# Altium PCB PCB2.PcbDoc
Units mil, origin at the board's own origin, x right, y up, seen from the top; angles counter-clockwise.
Board outline 2195 x 3890 mil, 2 copper layers (Top Layer, Bottom Layer); 16 components, 21 nets, 92 pads, 6 vias.
Unrouted connection lines stored in the file: 4.
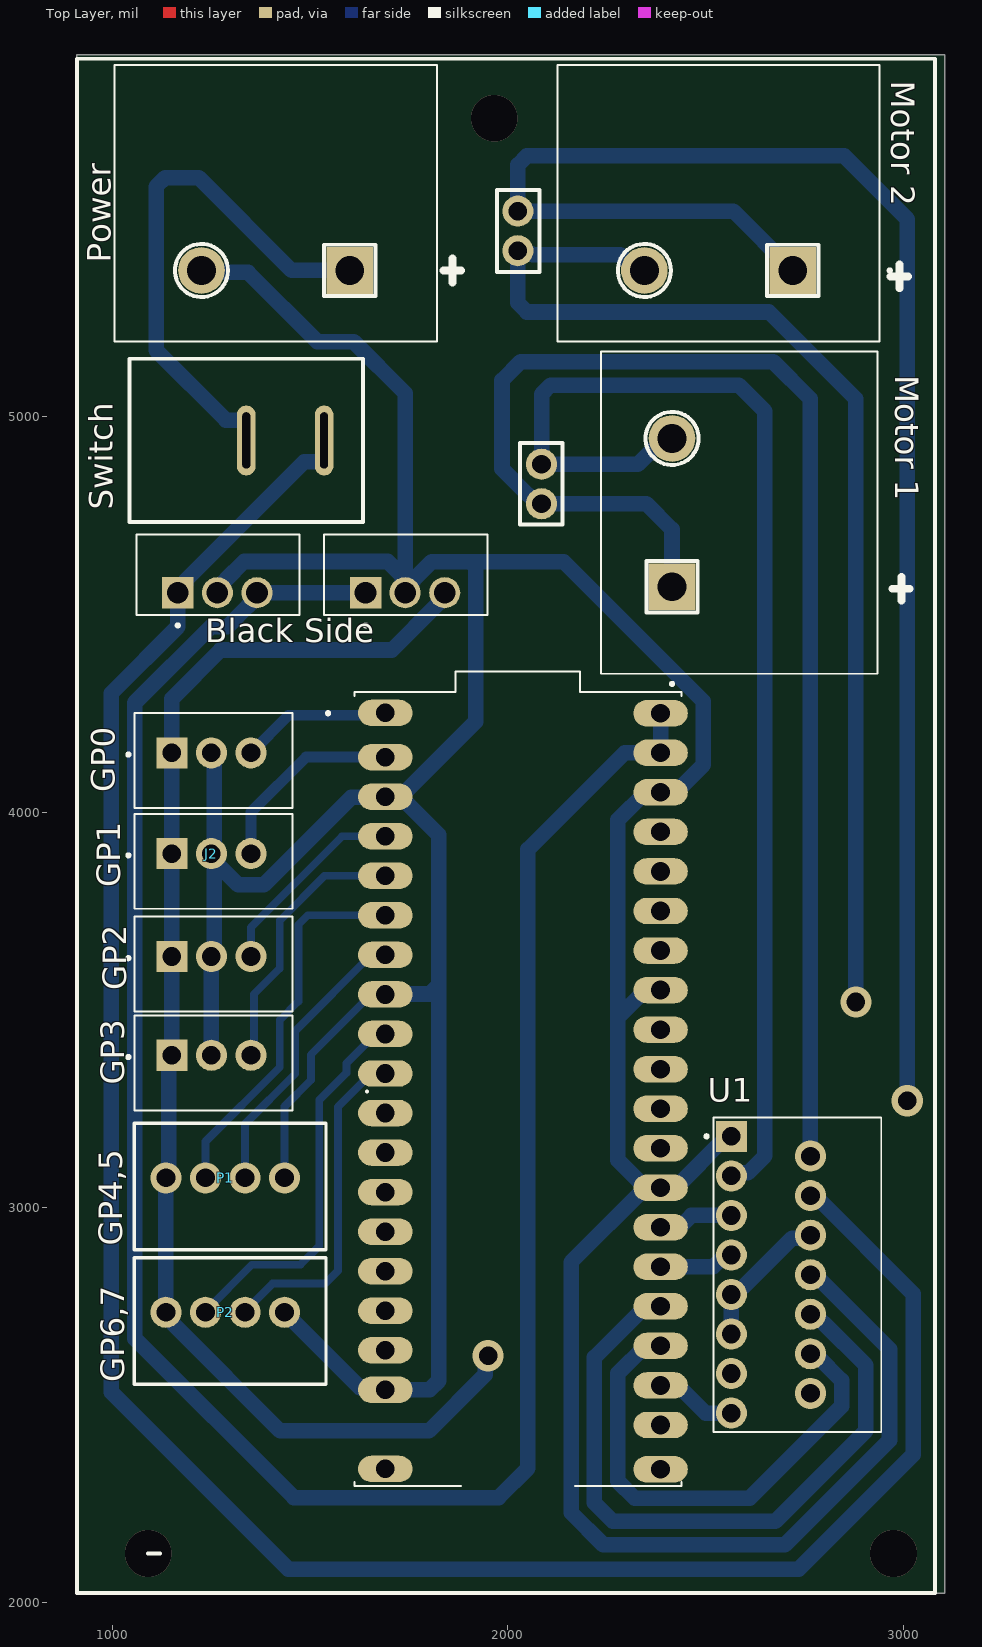
[diagram p0: Top Layer view]
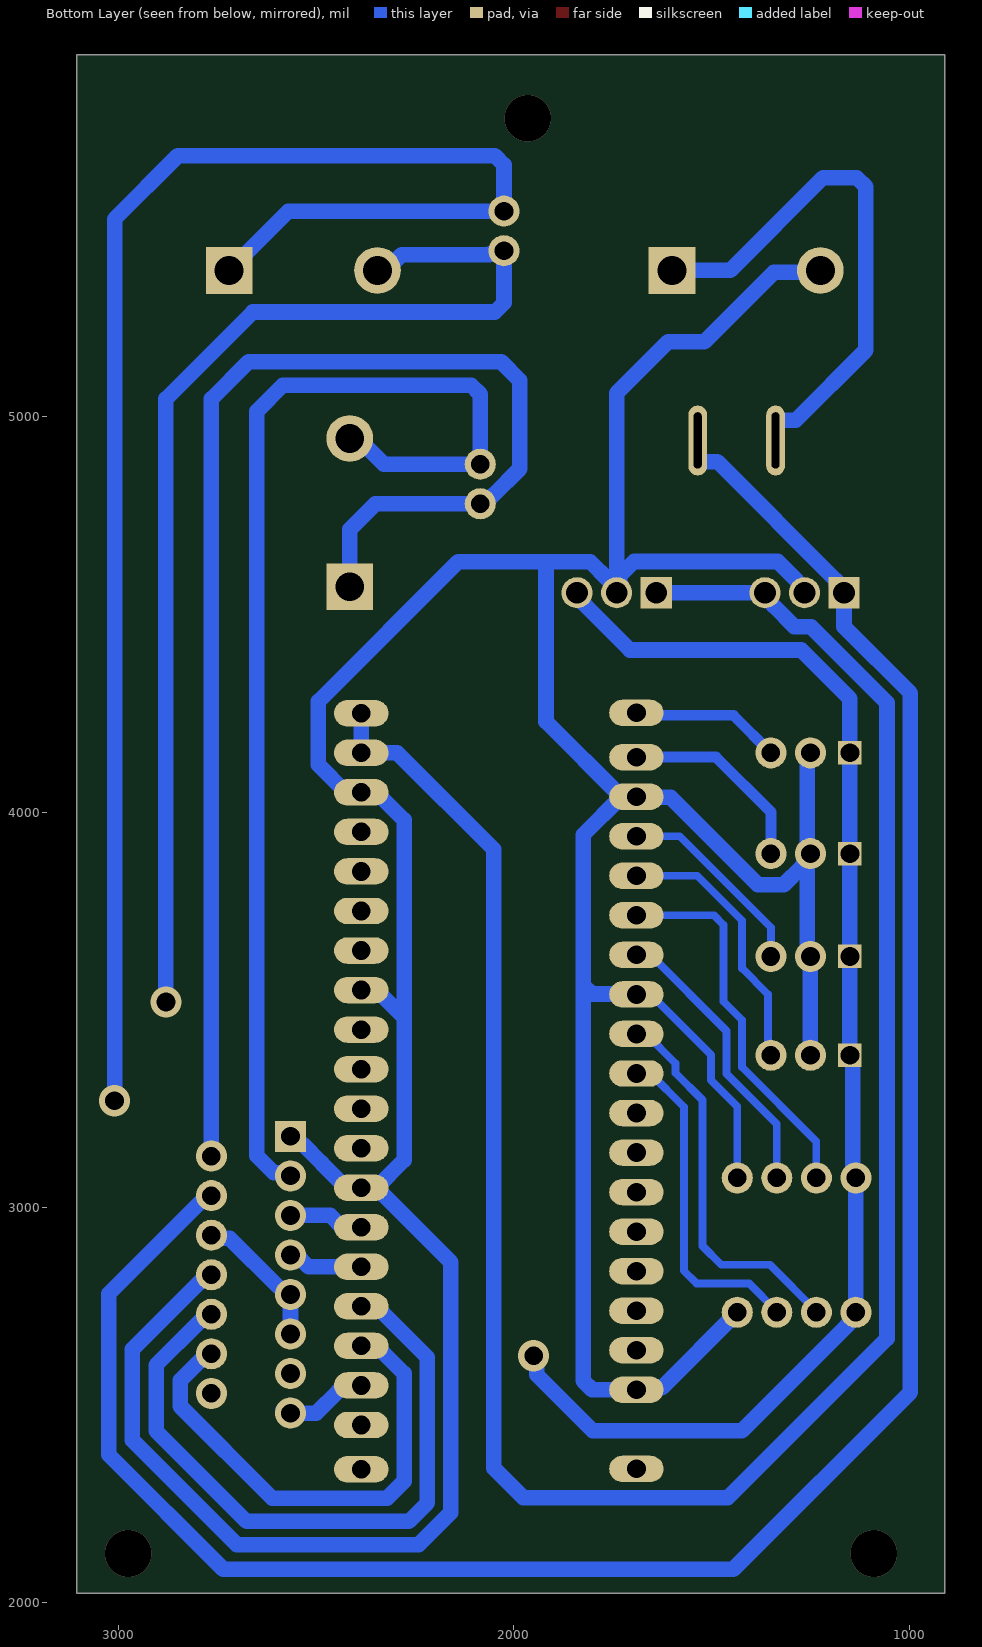
[diagram p1: Bottom Layer view, seen from below]
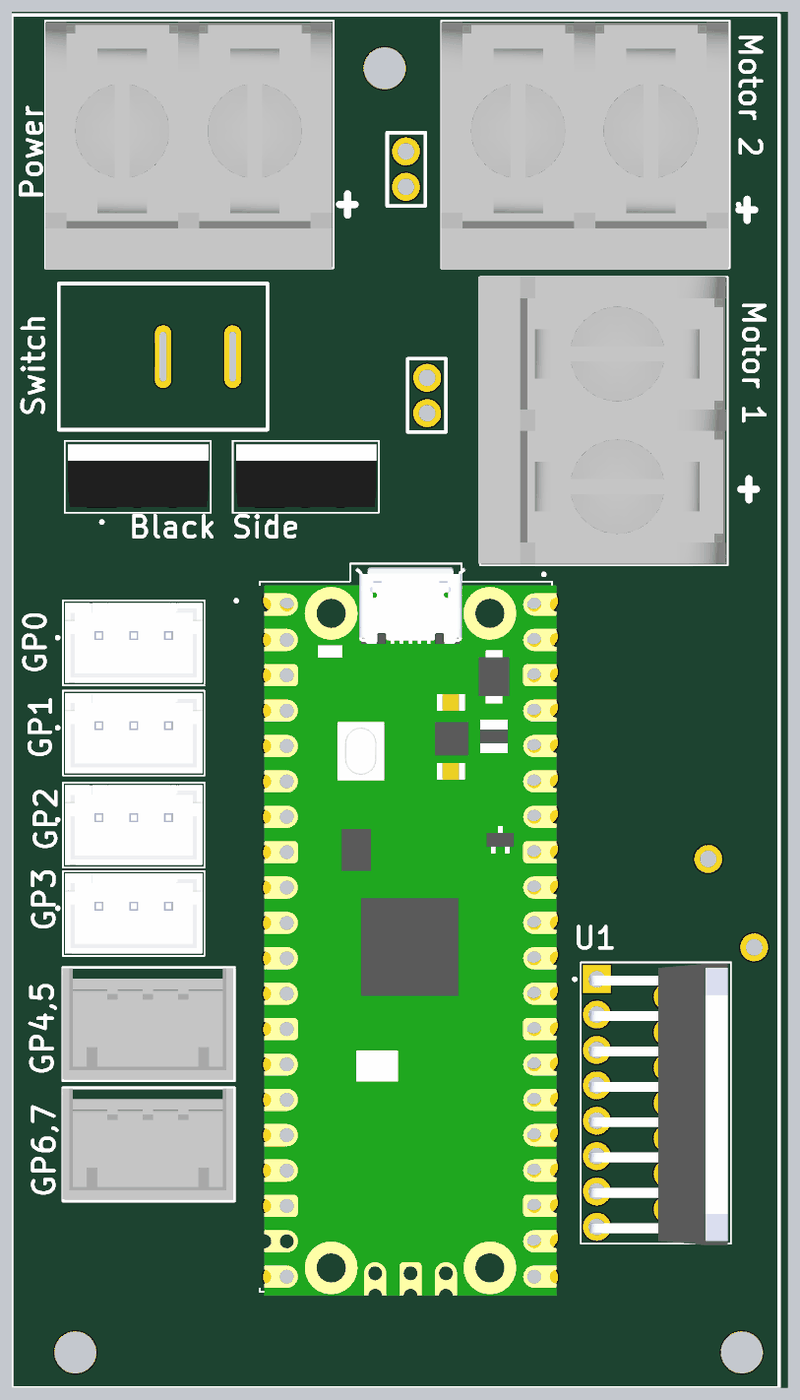
[diagram p2: 3D render of the assembled board from above, using the file's embedded part models]

## Layer stack, top to bottom
Top Solder: solder mask 0.4, Solder Resist, Dk 3.5
Top Layer: signal copper 1.4
Dielectric 1: dielectric 12.6, FR-4, Dk 4.8
Bottom Layer: signal copper 1.4
Bottom Solder: solder mask 0.4, Solder Resist, Dk 3.5

## Board outline
910,2025 3105,2025 3105,5915 910,5915

## Design rules (kind name [scope] priority, off if disabled: settings)
Clearance [All] p1: gap=19.68 ignorepadtopadclearanceinfootprint=TRUE
PolygonConnect [All] p1: connectstyle=Relief reliefconductorwidth=10 reliefentries=4 polygonreliefangle="90 Angle" airgapwidth=10
RoutingVias [All] p1: holewidth=28 width=50 viastyle="Through Hole" minholewidth=28 minwidth=50 maxholewidth=28 maxwidth=50
SolderMaskExpansion [All] p1: expansion=4 istentingtop=FALSE
Width [All] p1: maxlimit=39.37 minlimit=19.68 preferedwidth=27.56
30 further rules are at their usual default settings.

## Classes and differential pairs
component class Sheet2: J2 "Motor 2" P1 P2 Power U1

## Components (designator, comment, footprint, x,y, rotation, side; value= is the part's Value field where it differs from the comment)
* "switch" SWITCH 1193.87,4980.69 r270 top
*1 "Rasperi Pi" "RASPERI PI" 2025,3300 r0 top
*2 "regulator 3.3v" "REGULATOR 3.3V" 1640,4555 r0 top
*3 "regulator 7805" "REGULATOR 7805" 1165,4555 r0 top
*4 "Capacitor M1" CAPACITOR 2085,4880 r270 top
*5 "Capacitor M2" CAPACITOR 2025,5420 r90 top
GP0 "IR FL" "3PIN JST" 1250,4170.67 r0 top (schematic designator J1)
GP1 "IR BL" "3PIN JST" 1250,3655.67 r0 top (schematic designator J5)
GP2 "IR BR" "3PIN JST" 1250,3405.67 r0 top (schematic designator J3)
J2 "IR FR" "3PIN JST" 1250,3915.67 r0 top
J4 "Motor 1" "POWER TERMINAL BLOCK" 2415,4570 r90 top
"Motor 2" "Motor 2" "POWER TERMINAL BLOCK" 2720.2,5370 r180 top (schematic designator J6)
P1 "ULTR FL" "4PIN JST" 1260,3273 r0 top
P2 "ULTR FR" "4PIN JST" 1260,2933 r0 top
Power "Power" "POWER TERMINAL BLOCK" 1600,5370 r180 top (schematic designator J7)
U1 "L298N" L298N 2565,3180 r0 top

## Footprints (in the part's own frame and the unit in brackets; to place one, negate y for a bottom-side part, rotate by r counter-clockwise, add the part's x,y. Pads: shape width x height; smd on the part's side, far side on the other; paste and mask are expansions set on the pad)
"3PIN JST" [mm]
  rect 2x2 / inner round 1.508 / far side rect 1.508x1.508 hole 1.2: 1(-2.54,-0.525)
  round 2 hole 1.2: 2(0,-0.525) 3(2.54,-0.525)
  silkscreen extent -5.43,-4.06 5.21,2.03, body extent -4.82,-3.89 5.08,1.86, height 7
"4PIN JST" [mm]
  round 2 hole 1.2: 1(-3.175,-5.029) 2(-0.635,-5.029) 3(1.905,-5.029) 4(4.445,-5.029)
  silkscreen extent -5.21,-9.65 7.11,-1.52, body extent -5.26,-9.53 7.04,-1.57, height 10.43
CAPACITOR [mm]
  round 2 hole 1.2: 1(0,0) 2(2.54,0)
  silkscreen extent -1.37,-1.4 3.89,1.35
L298N [mm]
  rect 2x2 hole 1.2: 1(0,0)
  round 2 hole 1.2: 2(5.08,-1.27) 3(0,-2.54) 4(5.08,-3.81) 5(0,-5.08) 6(5.08,-6.35) 7(0,-7.62) 8(5.08,-8.89) 9(0,-10.16) 10(5.08,-11.43) 11(0,-12.7) 12(5.08,-13.97) 13(0,-15.24) 14(5.08,-16.51) 15(0,-17.78)
  silkscreen extent -1.69,-18.99 9.63,1.21, body extent -0.49,-19.09 9.4,1.11, height 21.15
"POWER TERMINAL BLOCK" [mm]
  rect 3x3 hole 1.854: 1(0,0)
  round 3 hole 1.854: 2(9.53,0)
  silkscreen extent -6.34,-13.21 15.12,4.57, body extent -5.47,-13.08 15.13,4.7, height 15.86
"RASPERI PI" [mm]
  oval 3.5x1.7 hole 1.2: 1(-8.509,24.155) 2(-8.509,21.311) 3(-8.509,18.771) 4(-8.509,16.231) 5(-8.509,13.691) 6(-8.509,11.151) 7(-8.509,8.611) 8(-8.509,6.071) 9(-8.509,3.531) 10(-8.509,0.991) 11(-8.509,-1.549) 12(-8.509,-4.089) 13(-8.509,-6.629) 14(-8.509,-9.169) 15(-8.509,-11.709) 16(-8.509,-14.249) 17(-8.509,-16.789) 18(-8.509,-19.329) 20(-8.509,-24.409) 21(9.169,-24.435) 22(9.169,-21.59) 23(9.169,-19.05) 24(9.169,-16.51) 25(9.169,-13.97) 26(9.169,-11.43) 27(9.169,-8.89) 28(9.169,-6.35) 29(9.169,-3.81) 30(9.169,-1.27) 31(9.169,1.27) 32(9.169,3.81) 33(9.169,6.35) 34(9.169,8.89) 35(9.169,11.43) 36(9.169,13.97) 37(9.169,16.51) 38(9.169,19.05) 39(9.169,21.59) 40(9.169,24.13)
  silkscreen extent -12.29,-25.5 10.5,26.8, body extent -10.17,-25.78 10.83,26.52, height 3.38
"REGULATOR 3.3V" [mm]
  rect 2.01x2.01 hole 1.4: 1(0,0)
  round 2 hole 1.4: 2(2.54,0) 3(5.08,0)
  silkscreen extent -2.67,-2.2 7.82,3.73, body extent -2.43,-1.02 7.67,3.48, height 19.85
"REGULATOR 7805" [mm]
  rect 2.01x2.01 hole 1.4: 1(0,0)
  round 2 hole 1.4: 2(2.54,0) 3(5.08,0)
  silkscreen extent -2.67,-2.2 7.82,3.73, body extent -2.43,-1.02 7.67,3.48, height 19.85
SWITCH [mm]
  oval 4.5x1.2 hole 0.5 slot 3.6 at 0 deg: 1(1.034,3.665) 2(1.034,8.665)
  silkscreen extent -4.22,-3.84 6.28,11.16

## Part data
*4 *5: library part Capacitor
GP0 GP1 GP2 J2: library part "3pin jst", "Connector Header Through Hole 3 position 0.098 (2.50mm)", Package=None, Availability="In Stock", Check_prices=https://www.snapeda.com/parts/B3B-XH-A(LF)(SN)/JST+Sales+America+Inc./view-part/?ref=eda, MF="JST Sales", MP=B3B-XH-A(LF)(SN), Price=None, Purchase-URL=https://pricing.snapeda.com/search/part/B3B-XH-A(LF)(SN)/?ref=eda, SnapEDA_Link=https://www.snapeda.com/parts/B3B-XH-A(LF)(SN)/JST+Sales+America+Inc./view-part/?ref=snap
J4 "Motor 2" Power: library part "Power Terminal block", "Conn Terminal Block 2 POS 9.53mm Solder ST Thru-Hole 25A/Contact", Package=None, Availability=Unavailable, EU_RoHS_Compliance=Compliant, MF="TE Connectivity / AMP", MP=4-1437652-6, Price=None, SnapEDA_Link=https://www.snapeda.com/parts/4-1437652-6/TE%20Connectivity%20/%20AMP/view-part/2382815/?ref=snap, TE_purchase_URL=https://www.te.com/usa-en/product-4-1437652-6.html?te_bu=Cor&te_type=disp&te_campaign=seda_glo_cor-seda-global-disp-prtnr-fy19-seda-model-bom-cta_sma-317_1&elqCampaignId=32493
P1 P2: library part "4pin jst", "Connector Header Through Hole 4 position 0.079 (2.00mm)", Package=None, Availability="In Stock", Check_prices=https://www.snapeda.com/parts/B4B-PH-K/JST/view-part/?ref=eda, MF=JST, MP=B4B-PH-K, Price=None, Purchase-URL=https://pricing.snapeda.com/search/part/B4B-PH-K/?ref=eda, SnapEDA_Link=https://www.snapeda.com/parts/B4B-PH-K/JST/view-part/?ref=snap
U1: "Dual Full Bridge Motor Driver 15-Pin(15+Tab) MULTIWATT V Tube", Package=None, Availability=Unavailable, MP=L298N, Price=None

## Via types
v1: diameter 78.74, hole 47.24, Top Layer to Bottom Layer, 3 vias
v2: diameter 118.11, hole 118.11, Top Layer to Bottom Layer, 3 vias

## Nets (pads, with @x,y where several pads share a name; then routed paths per layer and width w, separated by ;. In a path a pad name is that pad's centre, name@x,y a point inside that pad or via, vN(x,y) a via of type N, cw(c..) or ccw(c..) an arc to the next point about the centre after c; other vN are vias at no path point)
3V3: *2.3 GP0.1 GP1.1 GP2.1 J2.1 P1.1 P2.1 U1.6 U1.9 U1.11 | length 3776
  Bottom Layer w39.37: *2.3 1840,4544.35 1818.74,4523.09 1818.74,4522.38 1706.36,4410 1273.06,4410 1150,4286.94 GP0.1 J2.1 GP1.1 GP2.1 1142.53,3377.53 1142.53,3082.53 P1.1 P2.1 1135,2724.35 1156.26,2703.09 1156.26,2702.38 1423.64,2435 1800,2435 1942.47,2577.47 1942.47,2617.47 v1(1950,2625) ; U1.11 U1.9 2575.65,2780 2596.91,2801.26 2597.62,2801.26 2718.82,2922.47 2757.47,2922.47 U1.6
5V: *1.39 *1.40 *2.1 *3.3 | length 5653.2
  Bottom Layer w39.37: *2.1 *3.3 1365,4544.35 1343.74,4523.09 1343.74,4522.38 1290.41,4469.06 1248.6,4469.06 1056.26,4276.71 1056.26,2668.74 1458.83,2266.17 1976.17,2266.17 2050.45,2340.45 2050.45,3905.45 2294.96,4149.96 *1.39 ; *1.40@2345.29,4237.27 2358.02,4250 *1.40 *1.39
GND: *1.3 *1.8 *1.18 *1.23 *1.28 *1.33 *1.38 *2.2 *3.2 GP0.2 GP1.2 GP2.2 J2.2 P1.4 P2.4 Power.2 U1.1 U1.8 U1.15 | length 11825.7
  Bottom Layer w19.68: P1.4 1435,3255.64 1501.57,3322.22 1501.57,3386.01 1654.57,3539 *1.8
  Bottom Layer w39.37: Power.2 1229.82,5364.98 1342.91,5364.98 1518.22,5189.67 1610,5189.67 1740,5059.67 1740,4565.65 1761.26,4586.91 1761.26,4587.61 1807.38,4633.74 1905,4633.74 ; GP2.2 GP1.2 ; J2.2 1250,3884.35 J2.2@1257.53,3876.81 ; GP0.2@1252.53,4152.53 1257.53,4147.53 J2.2@1257.53,3876.81 ; GP1.2@1257.53,3635 J2.2@1257.53,3876.81 ; *3.2 1265,4565.65 1286.26,4586.91 1286.26,4587.62 1332.58,4633.94 1695.87,4633.94 1732.47,4597.34 1732.47,4562.53 *2.2 ; P2.4 1625.73,2544.27 1684.73,2544.27 *1.18 1801.94,2539 1825,2562.06 1825,3563.06 ; *1.8 1691,3540 1801.94,3540 1825,3563.06 ; *1.23 2428.89,2550 2442.67,2536.22 2443.78,2536.22 2500,2480 U1.15 2572.53,2487.53 U1.15@2583.89,2487.53 ; *1.33 2347.56,3550 2277.73,3480.17 ; U1.1 2545.32,3160.32 2533.96,3160.32 2486.26,3112.62 2486.26,3111.82 2424.44,3050 *1.28@2347.56,3050 ; U1.8@2754.35,2830 U1.8 2772.53,2822.47 2783.89,2822.47 2965,2641.36 2965,2411.48 2700.57,2147.06 2241.17,2147.06 2159.62,2228.6 2159.62,2862.06 *1.28@2347.56,3050 ; J2.2@1257.53,3876.81 1271.26,3863.09 1271.26,3862.38 1317.38,3816.26 1382.62,3816.26 1603.91,4037.55 1688.55,4037.55 *1.3 *1.3@1728.44,4039 ; *1.3@1728.44,4039 1918.74,4229.3 1918.74,4620 1905,4633.74 ; *1.3@1728.44,4039 1825,3942.44 1825,3563.06 ; 1905,4633.74 2140.7,4633.74 2494.27,4280.17 2494.27,4119.83 2424.44,4050 *1.38 2347.56,4050 2277.73,3980.17 2277.73,3480.17 ; 2277.73,3480.17 2277.73,3119.83 *1.28@2347.56,3050
GP0: *1.1 GP0.3 | length 381.8
  Bottom Layer w19.68: *1.1@1654.57,4251 *1.1
  Bottom Layer w27.56: GP0.3 1445,4245 1648.57,4245 *1.1@1654.57,4251
GP1: *1.2 J2.3 | length 502.6
  Bottom Layer w27.56: J2.3 1350,4000 1489,4139 *1.2
GP2: *1.4 GP1.3 | length 509
  Bottom Layer w19.68: GP1.3 1350,3708.48 1580.52,3939 *1.4@1651.56,3939
  Bottom Layer w39.37: *1.4@1651.56,3939 *1.4
GP3: *1.5 GP2.3 | length 685.7
  Bottom Layer w19.68: GP2.3@1357.47,3381.16 1357.47,3539.46 1422.83,3604.83 1422.83,3725.64 1536.2,3839 *1.5
GP4: *1.6 P1.2 | length 967.3
  Bottom Layer w19.68: P1.2 1235,3167 1422.83,3354.83 1422.83,3474.08 1470.08,3521.32 1470.08,3715.08 1494,3739 *1.6
GP5: *1.7 P1.3 | length 731.8
  Bottom Layer w19.68: P1.3 1335,3211.32 1462.2,3338.52 1462.2,3446.64 *1.7@1654.57,3639
  Bottom Layer w27.56: *1.7@1654.57,3639 *1.7
GP6: *1.9 P2.2 | length 978.9
  Bottom Layer w19.68: P2.2@1235,2738 1352.07,2855.08 1475.08,2855.08 1522.76,2902.76 1522.76,3271.76 1591.57,3340.57 1591.57,3365.09 1665.48,3439 *1.9
  Bottom Layer w27.56: P2.2 P2.2@1235,2738
GP7: *1.10 P2.3 | length 849.7
  Bottom Layer w19.68: P2.3@1335,2738 1404.83,2807.83 1537.83,2807.83 1570,2840 1570,3254.43 *1.10@1654.57,3339
  Bottom Layer w27.56: P2.3 P2.3@1335,2738 ; *1.10@1654.57,3339 *1.10
M11: *4.2 J4.1 U1.2 | length 3615.4
  Bottom Layer w39.37: J4.1 2415,4715 2350,4780 *4.2 2074.35,4780 2053.09,4801.26 2052.38,4801.26 1985,4868.64 1985,5091.94 2032.12,5139.06 2670.95,5139.06 2765,5045 U1.2
M11A: *1.27 U1.5 | length 191.4
  Bottom Layer w19.68: *1.27 *1.27@2434.22,2950
  Bottom Layer w39.37: *1.27@2434.22,2950 2464.22,2980 U1.5
M12: *4.1 J4.2 U1.3 | length 3125.1
  Bottom Layer w39.37: J4.2 2393.69,4945.2 2328.5,4880 *4.1 2085,5056.94 2108.06,5080 2583.89,5080 2650,5013.89 2650,3130.58 2606.95,3087.53 2572.53,3087.53 U1.3
M12A: *1.26 U1.7 | length 191.4
  Bottom Layer w19.68: U1.7@2549.02,2880 U1.7
  Bottom Layer w39.37: *1.26 2519.02,2850 U1.7@2549.02,2880
M21: "Motor 2.1" *5.2 U1.13 | length 4175.7
  Bottom Layer w39.37: U1.13 U1.13@2575.65,2580 ; 2720.2,5370 2570.2,5520 *5.2 2025,5636.94 2048.06,5660 2850,5660 3010,5500 v1(3010,3270)
M21A: *1.25 U1.10 | length 1749
  Bottom Layer w39.37: *1.25 2347.56,2750 2218.68,2621.11 2218.68,2253.06 2265.63,2206.11 2676.11,2206.11 2905,2435 2905,2601.36 2797.62,2708.74 2796.91,2708.74 2775.65,2730 U1.10
M22: "Motor 2.2" *5.1 U1.14 | length 2964
  Bottom Layer w39.37: 2345,5370 2323.69,5370 2283.69,5410 2062.84,5410 2060.37,5412.47 2032.53,5412.47 *5.1 2025,5288.06 2048.06,5265 2660,5265 2880,5045 v1(2880,3520) ; U1.14@2757.47,2537.53 U1.14
M22A: *1.24 U1.12 | length 1261.3
  Bottom Layer w39.37: *1.24 2347.56,2650 2277.73,2580.17 2277.73,2307.83 2320.4,2265.17 2611.52,2265.17 2843.74,2497.38 2843.74,2562.62 2783.89,2622.47 2772.53,2622.47 U1.12
Sw: *.1 Power.1 | length 1361.4
  Bottom Layer w39.37: *.1 1338.15,4987.93 1334.51,4991.57 1286.58,4991.57 1110,5168.15 1110,5581.94 1133.06,5605 1217.81,5605 1452.81,5370 Power.1
VCC: *3.1 *.2 U1.4 | length 5759.7
  Bottom Layer w39.37: *.2 1535,4890.24 1531.36,4886.61 1485.25,4886.61 1184.88,4586.24 1184.88,4574.88 *3.1 1165,4468.97 997.2,4301.18 997.2,2532.8 1445,2085 2735,2085 3025,2375 3025,2781.36 2783.89,3022.47 2772.53,3022.47 U1.4
pads on no net: *1.11 *1.12 *1.13 *1.14 *1.15 *1.16 *1.17 *1.20 *1.21 *1.22 *1.29 *1.30 *1.31 *1.32 *1.34 *1.35 *1.36 *1.37
copper on no net:
  other v2: 1090,2125 2975,2125 1965,5755

## Silkscreen, mask and mechanical layers (free items; w line width, h text height)
Top Overlay:
  circle w10: c2415,4945.2 r67.17
  circle w10: c2345,5370 r67.17
  circle w10: c1224.8,5370 r67.17
  lines w10: 1090,2125 1120,2125 ; 910,2025 3080,2025 3080,5905.51 910,5905.51 910,2025 ; 1535,5305 1535,5435 1665,5435 1665,5305 1535,5305 ; 2350,4505 2480,4505 2480,4635 2350,4635 2350,4505 ; 2655.2,5305 2785.2,5305 2785.2,5435 2655.2,5435 2655.2,5305
  lines w20: 1837.11,5370 1881.32,5370 ; 1860,5340 1860,5400 ; 2967.11,5355 3011.32,5355 ; 2972.11,4565 3016.32,4565 ; 2990,5325 2990,5385 ; 2995,4535 2995,4595
  text "Motor 1" at 2980,5105 h60 r270
  text "Switch" at 1000,4765 h60 r90
  text "Black Side" at 1235,4430 h60
  text "GP3" at 1030,3310 h60 r90
  text "GP4,5" at 1025.01,2903 h60 r90
  text "GP6,7" at 1030.01,2558 h60 r90